# Altium PCB WikiHub-Mini.PcbDoc
Units mil, origin at the board's own origin, x right, y up, seen from the top; angles counter-clockwise.
Board outline 1973.26 x 1977.05 mil, 2 copper layers (Top Layer, Bottom Layer); 66 components, 44 nets, 224 pads, 187 vias.
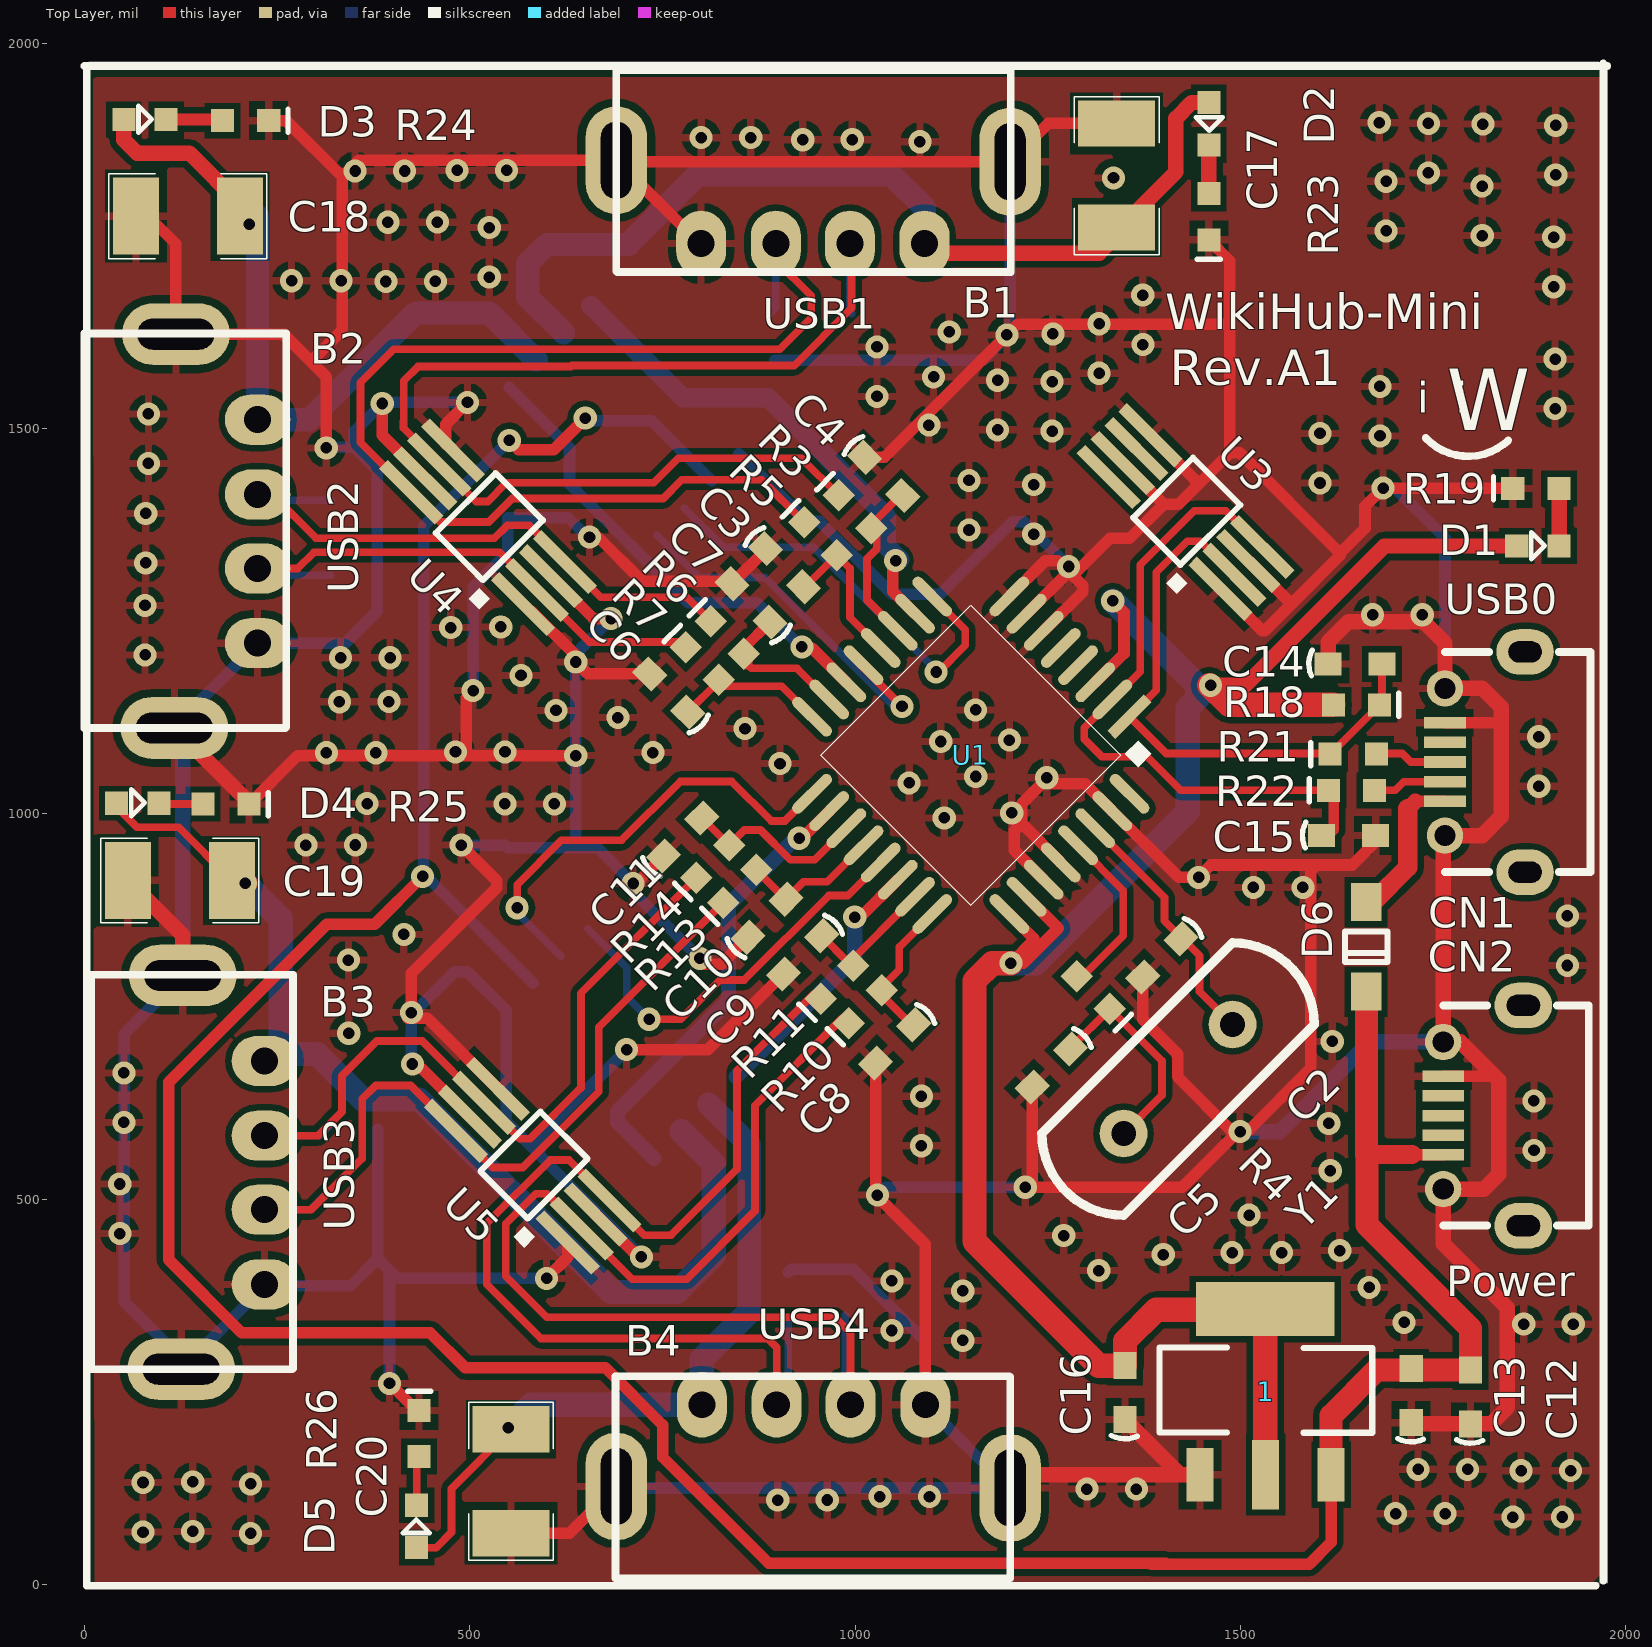
[diagram p0: Top Layer view]
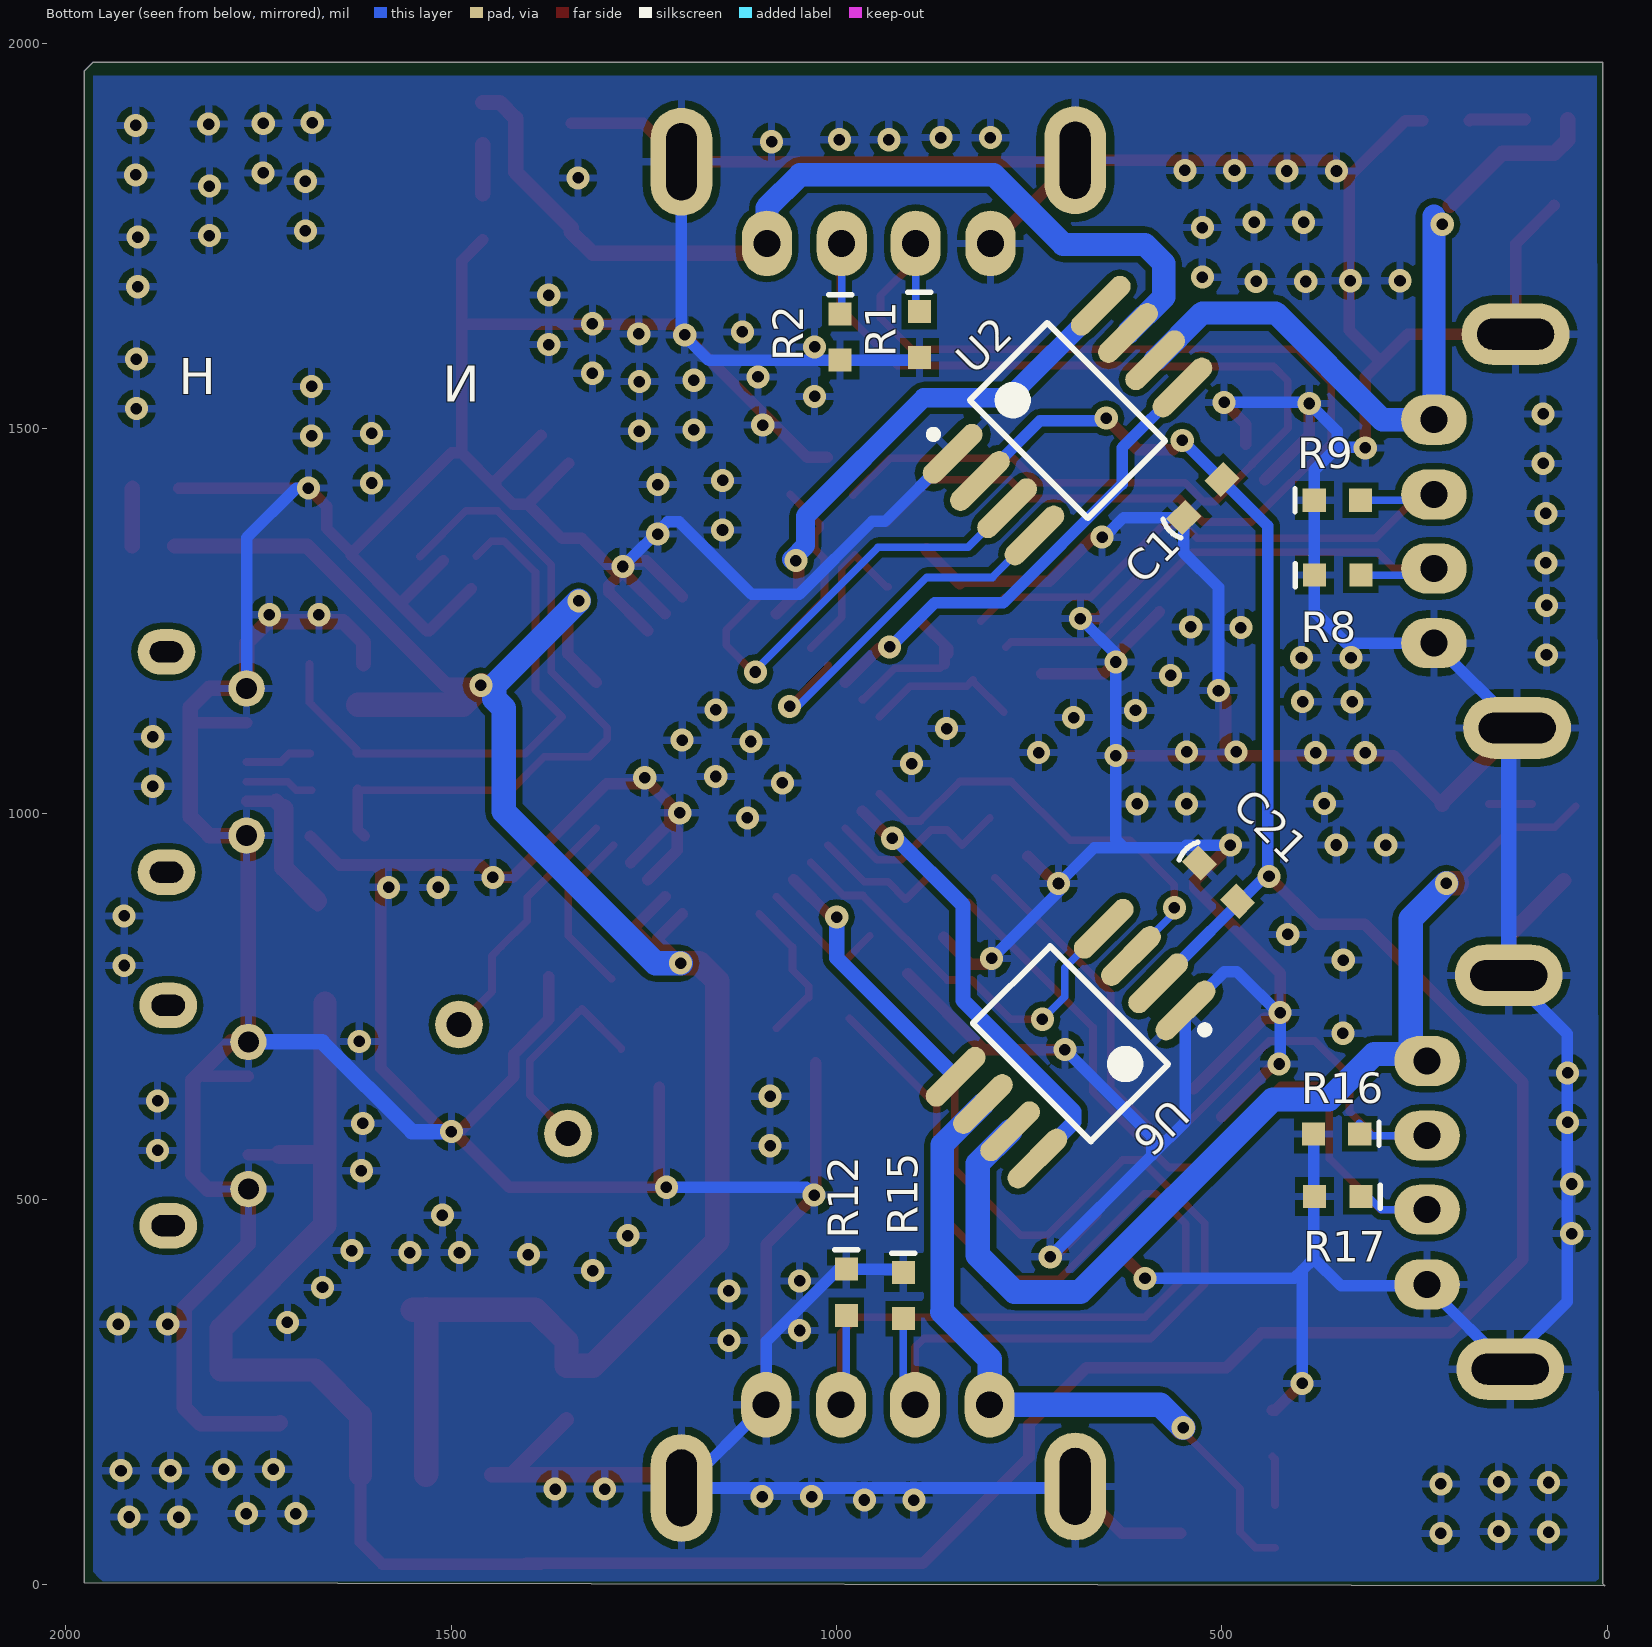
[diagram p1: Bottom Layer view, seen from below]
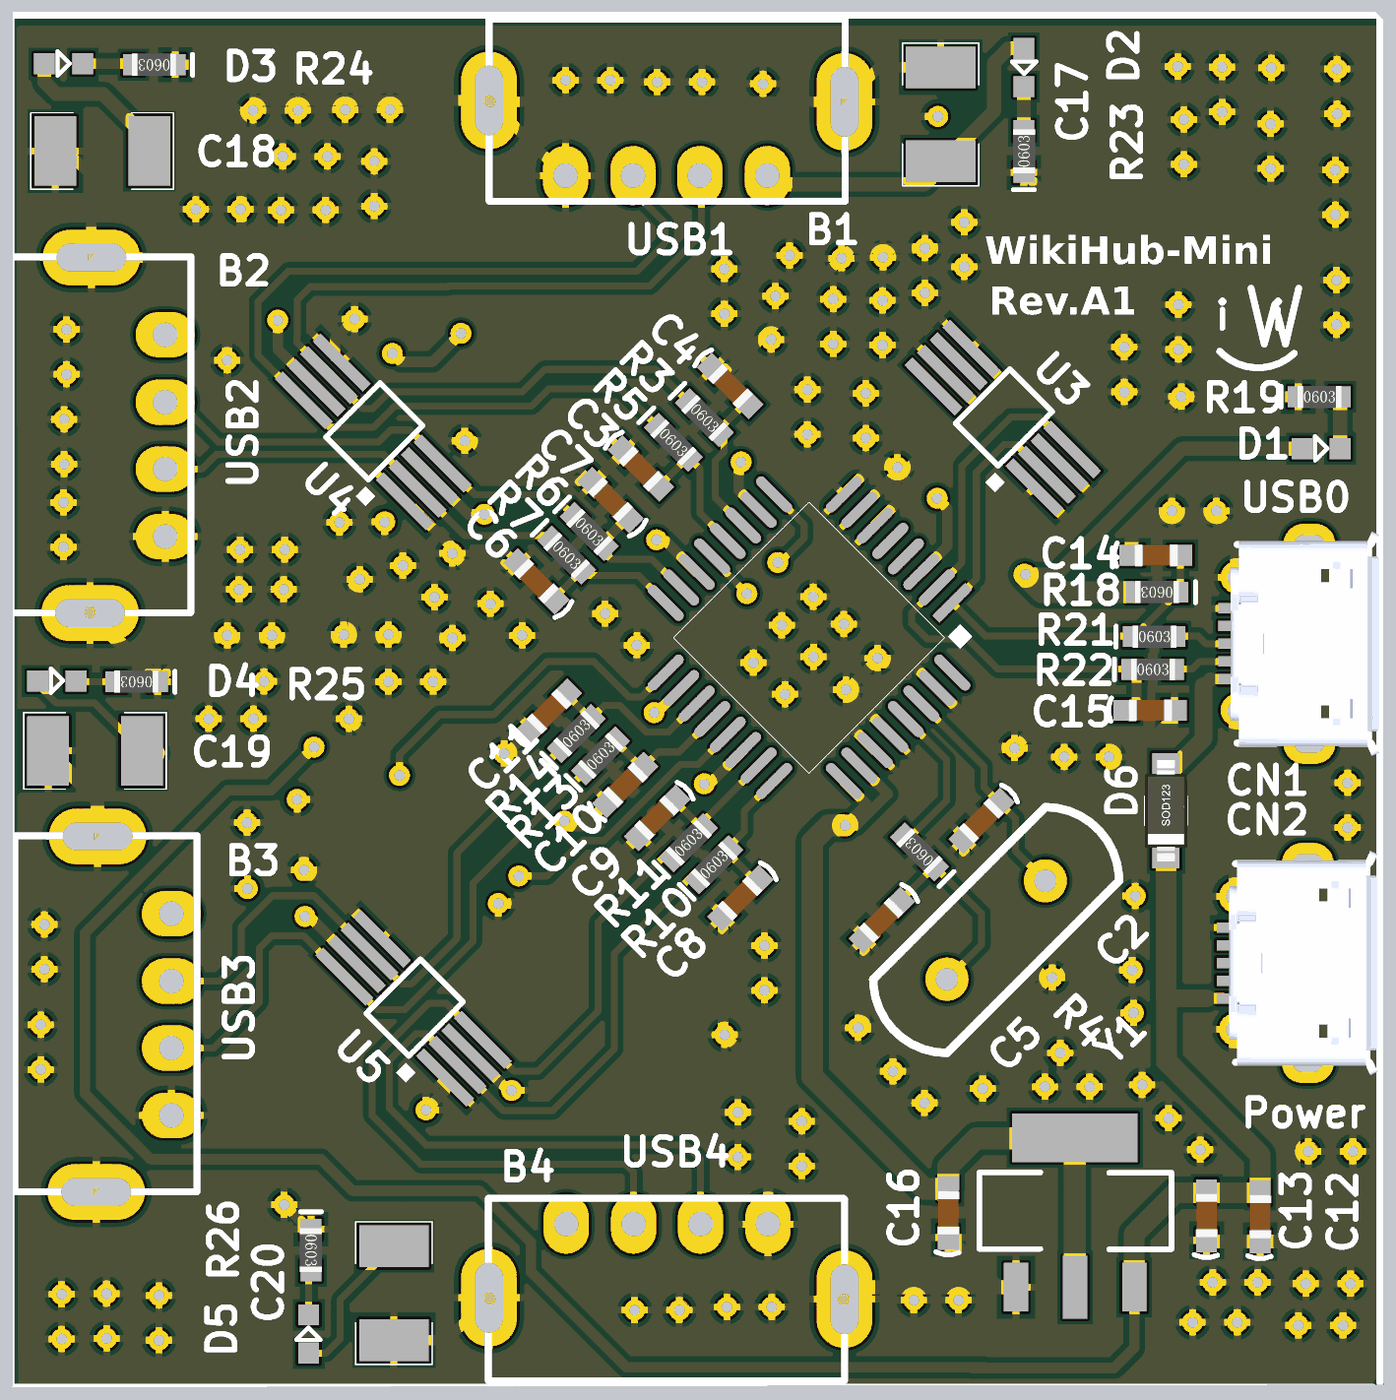
[diagram p2: 3D render of the assembled board from above, using the file's embedded part models]
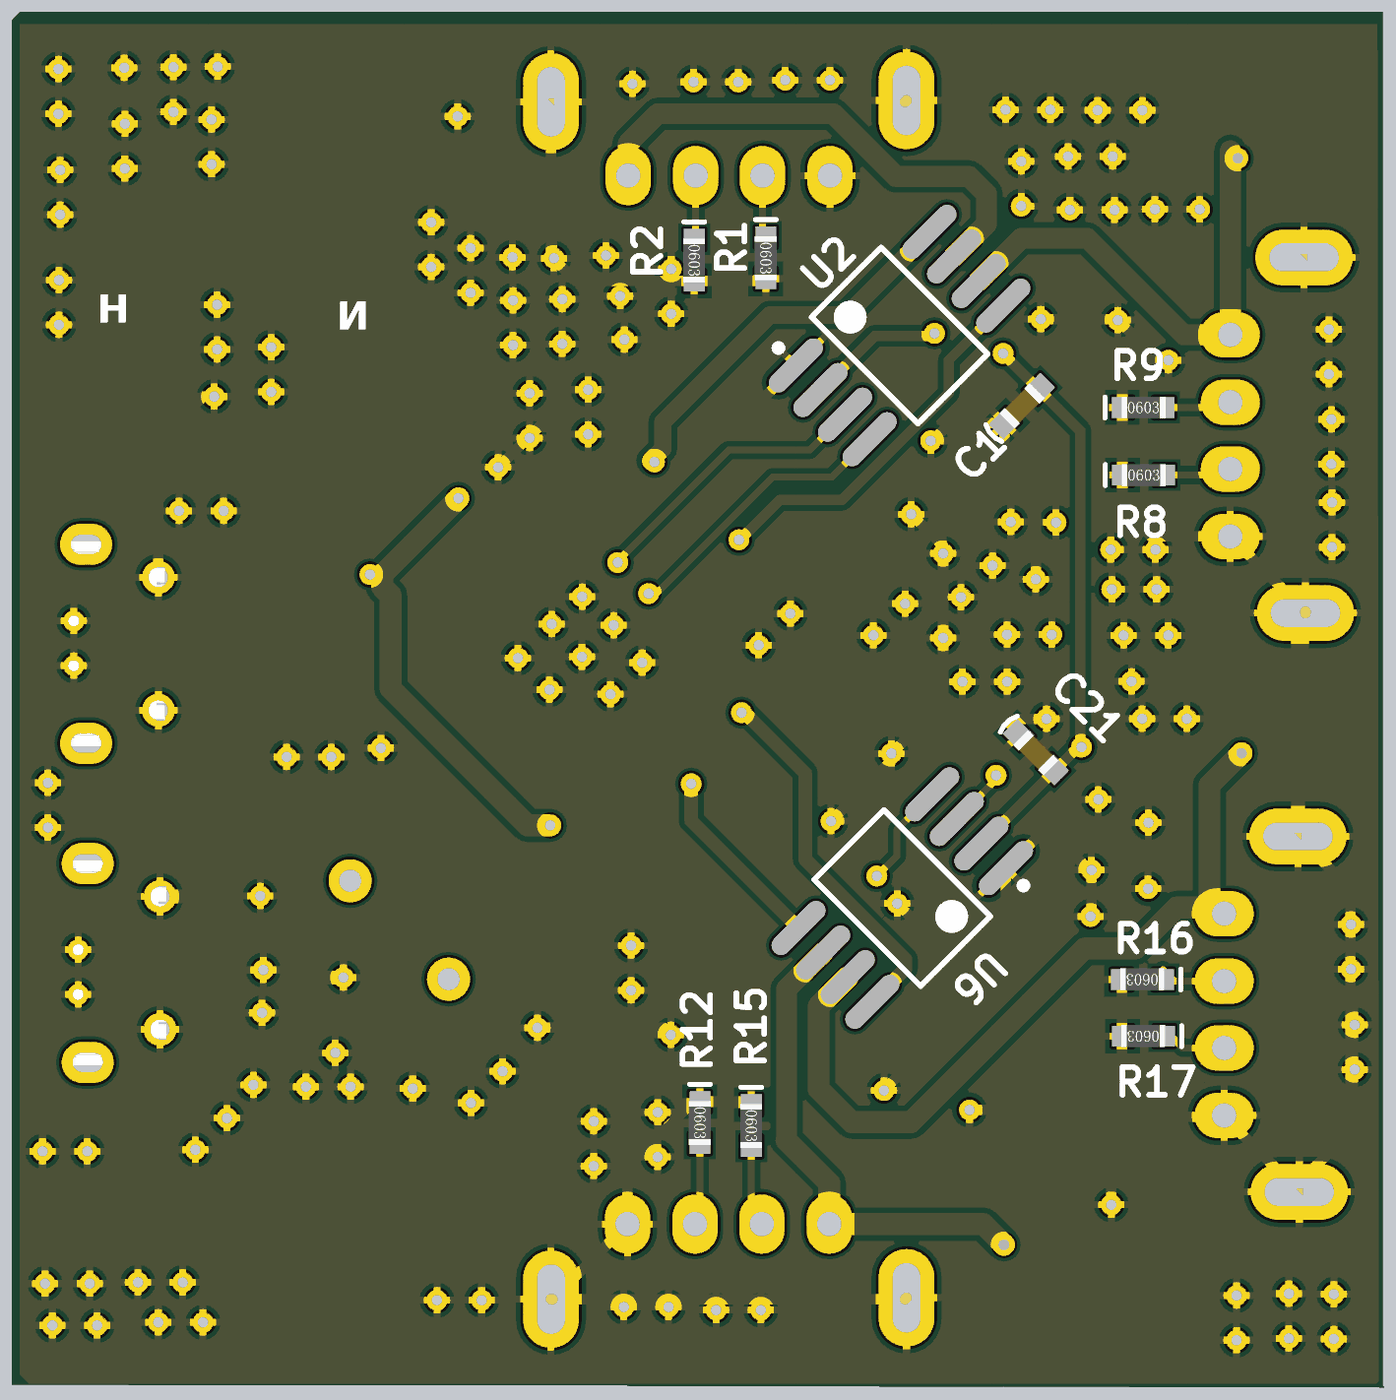
[diagram p3: 3D render of the assembled board from below, using the file's embedded part models]

## Layer stack, top to bottom
Top Solder: solder mask 0.4, Solder Resist, Dk 3.5
Top Layer: signal copper 1.4
Dielectric1: dielectric 12.6, FR-4, Dk 4.8
Bottom Layer: signal copper 1.4
Bottom Solder: solder mask 0.4, Solder Resist, Dk 3.5

## Board outline
2.87,-1.66 5.26,0.73 5.26,1975.39 1964.63,1975.39 1969.23,1970.79 1976.13,1963.89 1976.13,2.22

## Design rules (kind name [scope] priority, off if disabled: settings)
Clearance Clearance_1 [All] p1: gap=7.87
Clearance [All] p2 off: gap=0.01
PolygonConnect PolygonConnect_1 [All] p1: connectstyle=Relief reliefconductorwidth=10 reliefentries=4 polygonreliefangle="90 Angle" airgapwidth=10
RoomDefinition WikiHub-Mini [InComponentClass('WikiHub-Mini')] p1: confinementstyle=ConfineIn formatcopy=TRUE lockcomponents=FALSE outline -11.91,-15.15 1970.62,-15.15 1970.62,1984.6 -11.91,1984.6
RoutingVias [All] p1: holewidth=28 width=50 viastyle="Through Hole" minholewidth=10 minwidth=30 maxholewidth=28 maxwidth=50
SilkToSolderMaskClearance SilkscreenOverComponentPads [IsPad] p1: minsilkscreentomaskgap=10 clearancetoexposedcopper=TRUE
SolderMaskExpansion [All] p1: expansion=4
Width [All] p1: maxlimit=393.7 minlimit=10 preferedwidth=10 minimp=50.000000 maximp=50.000000 favimp=50.000000
28 further rules are at their usual default settings.

## Components (designator, comment, footprint, x,y, rotation, side; value= is the part's Value field where it differs from the comment)
1 "1117" 1117 1537.68,260.91 r0 top
B1 "USB" USB-A-Female-T2-Lite 1090.15,1740.33 r90 top
B2 "USB" USB-A-Female-T2-Lite 224.65,1511.52 r180 top
B3 "USB" USB-A-Female-T2-Lite 233.53,679.37 r180 top
B4 "USB" USB-A-Female-T2-Lite 801.15,233.21 r270 top
C1 "Cap" C0603L 524.43,1409.26 r135 bottom
C2 "27pF" C0603L 1398.14,813.13 r225 top
C3 "22pF" C0603L 908.38,1319.58 r315 top
C4 "22pF" C0603L 1037,1437.99 r315 top
C5 "27pF" C0603L 1254.64,670.17 r225 top
C6 "22pF" C0603L 758.16,1156.96 r135 top
C7 "22pF" C0603L 864.87,1273.9 r135 top
C8 "22pF" C0603L 1051.37,701.49 r225 top
C9 "22pF" C0603L 931.89,817.1 r225 top
C10 "22pF" C0603L 885.73,864.54 r45 top
C11 "22pF" C0603L 776.13,970.03 r45 top
C12 "Cap" C0603L 1798.62,243.34 r90 top
C13 "Cap" C0603L 1721.7,244.96 r90 top
C14 "22pF" C0603L 1648.81,1194.62 r0 top
C15 "22pF" C0603L 1640.52,971.79 r0 top
C16 "Cap" C0603L 1350.29,248.89 r90 top
C17 "100UF" 1210 1339.42,1760.81 r90 top
C18 "100UF" 1210 201.68,1775.67 r180 top
C19 "100UF" 1210 191.26,913.5 r180 top
C20 "100UF" 1210 553.49,201.46 r270 top
C21 "Cap" C0603L 504.1,911.47 r225 bottom
CN1 "USB-5P-2H" USB-B-MICRO-Female-T3 1765.49,1067.31 r270 top
CN2 "USB-5P-2H" USB-B-MICRO-Female-T3 1763.16,608.52 r270 top
D1 "LED" 0603pn 1858.67,1347.68 r0 top
D2 "LED" 0603pn 1459.03,1923.12 r270 top
D3 "LED" 0603pn 50.97,1901.1 r0 top
D4 "LED" 0603pn 41.4,1013.78 r0 top
D5 "LED" 0603pn 430.99,47.81 r90 top
D6 "B5817" SOD-123 1663.24,827.43 r90 top
R1 "15K" R0603 892.4,1622.04 r270 bottom
R2 "15K" R0603 995.23,1618.89 r270 bottom
R3 "27" R0603 999.82,1392.18 r315 top
R4 "1.5K" R0603 1309,768.01 r135 top
R5 "27" R0603 954.98,1357.04 r315 top
R6 "27" R0603 834.13,1228.73 r315 top
R7 "27" R0603 801.68,1195.16 r315 top
R8 "15K" R0603 349.45,1309.87 r180 bottom
R9 "15K" R0603 349.9,1406.95 r180 bottom
R10 "27" R0603 1013.19,749.65 r45 top
R11 "27" R0603 976.57,781.42 r45 top
R12 "15K" R0603 987.15,379.13 r270 bottom
R13 "27" R0603 850.23,906.16 r45 top
R14 "27" R0603 815.35,938.17 r45 top
R15 "15K" R0603 913.18,374.93 r270 bottom
R16 "15K" R0603 350.9,584.74 r0 bottom
R17 "15K" R0603 349.49,503.3 r0 bottom
R18 "1K5" R0603 1650.67,1141.52 r180 top
R19 "1K" R0603 1883.49,1422.4 r0 top
R21 "0" R0603 1646.41,1077.67 r0 top
R22 "0" R0603 1644.17,1030.49 r0 top
R23 "1K" R0603 1459.04,1774.94 r90 top
R24 "1K" R0603 209.02,1899.59 r180 top
R25 "1K" R0603 183.62,1012.69 r180 top
R26 "1K" R0603 434.21,195.93 r270 top
U1 "TUSB 32" TQFP32 1183.46,1088.32 r225 top
U2 "TPS2042" SO8W_M 700.11,1510.41 r135 bottom
U3 "SN75240" "SOP8 - 0.65" 1474.09,1292.2 r135 top
U4 "SN75240" "SOP8 - 0.65" 569.03,1272.36 r135 top
U5 "SN75240" "SOP8 - 0.65" 627.1,443.88 r135 top
U6 "TPS2042" SO8W_M 696.21,701.81 r315 bottom
Y1 "6M" XTAL 1344.89,581.65 r45 top

## Footprints (in the part's own frame and the unit in brackets; to place one, negate y for a bottom-side part, rotate by r counter-clockwise, add the part's x,y. Pads: shape width x height; smd on the part's side, far side on the other; paste and mask are expansions set on the pad)
0603pn [mil]
  rect 30x30 smd: 1(0,0) 2(55,0)
  silkscreen extent 19,-17 36,18
1117 [mil]
  rect 35x70 smd: 1(-90,-118.5) 3(80,-118.5)
  rect 180x70 smd: 2(-5.5,96.5)
  rect 35x90 smd: 2(-5,-118.5)
  silkscreen extent -142,-64 134,46
1210 [mil]
  rect 60x100 smd: 1(0,0) 2(135,0)
  silkscreen extent -35,-55 170,55
C0603L [mil]
  rect 35x30 smd: 1(-35,0) 2(35,0)
  silkscreen extent -60,-16 -56,18, body extent -31,-16 32,15, height 24
R0603 [mil]
  rect 30x30 smd: 1(-30,0) 2(30,0)
  silkscreen extent -55,-15 -55,15, body extent -31,-16 32,15, height 18
SO8W_M [mm] "8-Pin Small Outline Package 1.27 mm Pitch, IPC Low Density"
  oval 2.5x0.7 smd: 1(-3.45,1.905) 2(-3.45,0.635) 3(-3.45,-0.635) 4(-3.45,-1.905) 5(3.45,-1.905) 6(3.45,-0.635) 7(3.45,0.635) 8(3.45,1.905)
  silkscreen extent -3.57,-2.75 1.8,2.93, body extent -2.73,-2.75 2.73,2.75, height 2.13
SOD-123 [mm]
  rect 1.25x1 smd: 1(1.475,0) 2(-1.475,0)
  silkscreen extent -0.5,-0.7 0.5,0.7, body extent -1.85,-0.77 1.85,0.78, height 1.35
"SOP8 - 0.65" [mm] "Small Outline; 8 Leads; Body Width 4.3 mm; Pitch 1.27 mm"
  rect 2.6x0.4 smd: 1(0,0) 2(0,-0.65) 3(0,-1.3) 4(0,-1.95) 5(5.207,-1.95) 6(5.207,-1.3) 7(5.207,-0.65) 8(5.207,0)
  silkscreen extent 0.89,-2.41 3.69,1.14
TQFP32 [mm]
  rect 1.7x0.37 smd: 1(-3.781,2.422)
  oval 1.7x0.37 smd: 2(-3.781,1.622) 3(-3.781,0.822) 4(-3.781,0.022) 5(-3.781,-0.778) 6(-3.781,-1.578) 7(-3.781,-2.378) 8(-3.781,-3.178) 17(5.419,-3.178) 18(5.419,-2.378) 19(5.419,-1.578) 20(5.419,-0.778) 21(5.419,0.022) 22(5.419,0.822) 23(5.419,1.622) 24(5.419,2.422)
  oval 0.37x1.7 smd: 9(-1.981,-4.978) 10(-1.181,-4.978) 11(-0.381,-4.978) 12(0.419,-4.978) 13(1.219,-4.978) 14(2.019,-4.978) 15(2.819,-4.978) 16(3.619,-4.978) 25(3.619,4.222) 26(2.819,4.222) 27(2.019,4.222) 28(1.219,4.222) 29(0.419,4.222) 30(-0.381,4.222) 31(-1.181,4.222) 32(-1.981,4.222)
  silkscreen extent -3.43,-3.88 4.32,3.81
USB-A-Female-T2-Lite [mil]
  oval 85x65 hole 35: 1(0,0) 2(0,97) 3(0,193) 4(0,290)
  oval 140x80 hole 40 slot 100 at 0 deg: 5(108,400) 6(106,-111)
  silkscreen extent -37,-112 225,400
USB-B-MICRO-Female-T3 [mil] "USB Micro SMT 5S B"
  rect 15x54 smd: 1(51,0) 2(25.5,0) 3(0,0) 4(-25.5,0) 5(-51,0)
  round 47.24 hole 27.5: 6(-95.5,0) 7(95.5,0)
  oval 59.06x74.8 hole 27.56 slot 43.31 at 90 deg: 8(143,104) 9(-143,104)
  silkscreen extent -143,0 143,189, body extent -161,-9 161,204, height 105
XTAL [mil]
  round 62 hole 32: 1(5,0) 2(205,0)
  silkscreen extent -101,-75 311,75

## Part data
1: library part 117
C1 C12 C13 C16 C21: "Capacitor"
C2 C3 C4 C5 C6 C7 C8 C9 C10 C11 C14 C15: library part Cap, "Capacitor"
C17 C18 C19 C20: library part CAP, "Capacitor"
CN1 CN2: "USB-M5P-2H"
D1 D2 D3 D4 D5: library part LED0, "Typical INFRARED GaAs LED"
D6: library part "D Schottky", "Schottky Diode"
R1 R2 R3 R4 R5 R6 R7 R8 R9 R10 R11 R12 R13 R14 R15 R16 R17 R18 R19 R21 R22 R23 R24 R25 R26: library part RES
Y1: library part XTAL, "Crystal Oscillator"

## Via types
v1: diameter 30, hole 15, Top Layer to Bottom Layer, 187 vias

## Nets (pads, with @x,y where several pads share a name; then routed paths per layer and width w, separated by ;. In a path a pad name is that pad's centre, name@x,y a point inside that pad or via, vN(x,y) a via of type N, cw(c..) or ccw(c..) an arc to the next point about the centre after c; other vN are vias at no path point)
D3V3: 1.2 C16.2 D1.1 R18.2 U1.3 U1.25 U1.26 | length 2755.2
  Top Layer w15: U1.25 1231.95,838.33 1231.95,836.02 v1(1202.21,806.28) 1218.34,806.28 1263.44,851.38 U1.26 ; U1.3 1348.92,1208.01 1348.92,1261.83 v1(1334.28,1276.47)
  Top Layer w20: v1@1459.74,1166.87 1505.99,1166.87 1686.8,1347.68 D1.1
  Top Layer w31.5: v1(1202.21,806.28) 1177.92,806.28 1154.79,783.15 1154.79,445.32 1316.23,283.89 C16.2 1350.29,315.86 1390.86,356.42 1.2@1549.92,356.42 ; v1@1459.74,1166.87 1485.1,1141.52 R18.2 ; 1.2@1532.18,357.41 1532.18,142.91 1.2@1532.68,142.41
  Bottom Layer w31.5: v1(1202.21,806.28) 1234.83,806.28 1431.69,1003.14 1431.69,1137.15 1443.92,1149.38 1443.92,1166.82 v1(1334.28,1276.47)
  other v1: 1461.42,1166.87
D5V: 1.3 C1.2 C12.2 C13.2 C21.2 CN2.1 D6.2 U2.2 U6.2 | length 4525.6
  Top Layer w15: v1(438.65,918.8) 376.67,856.82 314.47,856.82 109.19,651.54 109.19,421.41 204.22,326.37 448.79,326.37 494.09,281.08 676.01,281.08 750.13,206.96 750.13,165.32 888.18,27.27 1402.85,27.27 ; v1(551.2,1484.65) 563.18,1472.68 608.98,1472.68 v1(649.85,1513.54) ; 1384.39,26.3 1589.17,26.3 1617.68,54.81 1.3 ; 1722.3,557.82 CN2.1
  Top Layer w25: 1663.58,557.52 1664.11,557.52 1722.3,557.82
  Top Layer w30: 1.3 1617.68,219.04 1676.98,278.34 C12.2 1798.62,332.04 1664.11,466.55 1664.11,557.52 ; 1663.58,557.52 D6.2@1663.58,754.49
  Bottom Layer w15: v1(438.65,918.8) 443.86,918.8 U6.2 ; v1@440.23,922.43 440.23,1373.68 v1(551.2,1484.65) ; v1(649.85,1513.54) 653.37,1510.02 735.85,1510.02 U2.2
DM0: C15.1 R22.1 U1.2 U3.4 | length 894.4
  Top Layer w10: U3.4@1540.31,1334.02 1481.07,1393.27 1439.93,1393.27 1370,1323.34 1370,1184.56 U1.2 1297.37,1111.92 1297.37,1097.21 1320.45,1074.13 1379.09,1074.13 1422.38,1030.84 R22.1@1621.12,1030.84
  Top Layer w14: C15.1@1612.58,971.22 1621.12,979.75 R22.1@1621.12,1030.84
DM1: B1.2 R2.1 R3.1 U4.6 | length 1506.4
  Top Layer w10: U4.6 508.46,1405.31 523.11,1405.31 547.49,1429.68 738.66,1429.68 770.61,1461.63 930.37,1461.63 R3.1 ; U4.6@460.72,1453.97 414.03,1500.66 414.03,1509.53 414.28,1509.79 414.28,1562.05 432.82,1580.58 631.37,1580.58 632.55,1581.76 920.83,1581.76 995.23,1656.16 995.23,1738.25 B1.2
  Bottom Layer w10: B1.2 993.15,1650.97 R2.1
DM2: B2.2 R6.1 R9.2 U4.4 | length 769
  Top Layer w10: B2.2 243.46,1414.52 300.45,1357.52 531.83,1357.52 548.91,1374.61 576.79,1374.61 670.08,1281.32 781.54,1281.32 R6.1
  Bottom Layer w10: B2.2 232.22,1406.95 R9.2
DM3: B3.2 R14.1 R16.1 U5.6 | length 998
  Top Layer w10: B3.2 302.89,582.37 334.08,613.55 334.08,660.09 379.19,705.2 438.16,705.2 U5.6 565.06,578.3 578.11,578.3 644.19,644.38 644.19,767.01 R14.1
  Bottom Layer w10: B3.2 305.16,582.37 R16.1@321.39,598.6
DM4: B4.2 R11.1 R15.2 U5.4 | length 1384.8
  Top Layer w10: B4.2 898.15,307.54 886.62,319.07 592.45,319.07 522.1,389.42 522.1,468.64 604.2,550.74 628.82,550.74 U5.4 726.5,453.06 761.01,453.06 846.65,538.7 846.65,666.47 R11.1@946.38,766.19
  Bottom Layer w10: B4.2 913.18,248.23 R15.2
DP0: C14.2 R18.1 R21.1 U1.1 U3.2 | length 731.3
  Top Layer w10: U3.2@1467.4,1334.47 1447.95,1353.92 1430.91,1353.92 1390.67,1313.68 1390.67,1160.68 U1.1 1403.94,1078.36 1622.86,1078.36 1622.86,1083.71 R18.1 1683.81,1144.65 C14.2
DP1: B1.3 R1.1 R5.1 U4.8 | length 1586.8
  Top Layer w10: B1.3@904.62,1732.86 B1.3 897.15,1717.89 942.91,1672.13 942.91,1643.58 902.28,1602.95 401.51,1602.95 358.04,1559.48 358.04,1482.36 461.61,1378.79 524.43,1378.79 554.89,1409.25 751.02,1409.25 775.25,1433.47 878.54,1433.47 R5.1
  Top Layer w14: B1.3@904.62,1732.86 B1.3@911.17,1726.32
  Bottom Layer w10: R1.1 897.15,1656.79 B1.3
DP2: B2.3 R7.1 R8.2 U4.2 | length 714
  Top Layer w10: B2.3 276.76,1318.52 297.89,1339.65 538.7,1339.65 655.38,1222.97 773.87,1222.97 R7.1
  Bottom Layer w10: B2.3 233.31,1309.87 R8.2
DP3: B3.3 R13.1 R17.1 U5.8 | length 1039
  Top Layer w10: B3.3 293.85,486.37 360.36,552.87 360.36,630.16 377.77,647.57 423.41,647.57 U5.8 529.84,541.14 568.69,541.14 667.19,639.64 667.19,723.12 R13.1
  Bottom Layer w10: B3.3 292.77,486.37 R17.1@318.79,512.39
DP4: B4.3 R10.1 R12.2 U5.2 | length 1476.4
  Top Layer w10: R10.1@983,734.42 870,621.41 870,484.64 781.63,396.27 710.91,396.27 U5.2 600.18,506.99 585.74,506.99 546.64,467.9 546.64,399.87 599.64,346.87 973.32,346.87 994.15,326.05 B4.3
  Bottom Layer w10: R12.2 987.15,240.21 B4.3
EN1: U1.9 U2.3 | length 549.5
  Top Layer w10: U1.9 1143.04,1239.04 1143.04,1218.8 1108.36,1184.11 v1(1105.19,1184.11)
  Bottom Layer w10: U2.3 829.3,1345.86 945.98,1345.86 1105.19,1186.65 v1(1105.19,1184.11)
EN2: U1.13 U2.4 | length 483.8
  Top Layer w10: U1.13 1010.94,1189.38 v1(1060.85,1139.47)
  Bottom Layer w10: U2.4 797.61,1306.84 882.81,1306.84 1050.17,1139.47 v1(1060.85,1139.47)
EN3: U1.17 U6.3 | length 590.7
  Top Layer w10: v1(561.44,878.19) 561.44,908.2 618.83,965.6 696.76,965.6 773.11,1041.94 839.98,1041.94 891.05,990.87 909.06,990.87 U1.17
  Bottom Layer w10: v1(561.44,878.19) 560.39,877.14 560.39,872.98 U6.3
EN4: U1.21 U6.4 | length 535
  Top Layer w10: v1(732.77,733.53) 773.77,733.53 824.77,784.53 856.19,784.53 965.62,893.96 990.33,893.96 U1.21
  Bottom Layer w10: U6.4 703.74,800.34 703.74,762.56 v1(732.77,733.53)
GND: 1.1 B1.4 B1.5 B1.6 B2.4 B2.5 B2.6 B3.4 B3.5 B3.6 B4.4 B4.5 B4.6 C1.1 C2.2 C3.1 C4.1 C5.2 C6.2 C7.2 C8.2 C9.2 C10.1 C11.1 C12.1 C13.1 C14.1 C15.2 C16.1 C17.2 C18.2 C19.2 C20.2 C21.1 CN1.5 CN1.6 CN1.7 CN2.5 CN2.6 CN2.7 R1.2 R2.2 R8.1 R9.1 R12.1 R15.1 R16.2 R17.2 R19.1 R23.1 R24.1 R25.1 R26.1 U1.6 U1.7 U1.8 U1.27 U1.28 U1.31 U2.1 U3.1 U3.3 U3.5 U3.7 U4.1 U4.3 U4.5 U4.7 U5.1 U5.3 U5.5 U5.7 U6.1 | length 18922.4
  Top Layer w15: C18.2@68.8,1789.48 118.65,1739.63 B2.6 258.56,1622.52 313.7,1567.38 v1(313.7,1474.91) ; R25.1 276.64,1075.72 v1@495.11,1075.72 ; R24.1 261.81,1899.59 334.36,1827.04 ; 294.2,1587.38 334.36,1627.53 334.36,1827.04 ; v1(386.41,1532.54) 386.41,1491.19 U4.7@444.04,1433.56 ; v1(395.76,260.96) 430.78,225.93 R26.1 ; v1(425.55,675.44) 430.83,670.17 437,670.17 U5.7 ; U4.5@468.79,1479.65 468.79,1505.74 v1(497.02,1533.98) ; v1(488.86,959.48) 535.04,913.3 535.04,904.04 424.2,793.2 v1(424.2,742.12) 424.2,739.18 419.61,734.59 444.97,734.59 U5.5 ; v1(504.23,1159.99) 495.11,1150.88 v1@495.11,1075.72 ; C20.2 629.4,66.46 B4.6 ; U4.1@580.81,1262.32 637.44,1205.69 v1(637.44,1197.12) 652.85,1181.71 C6.2 ; v1(599.59,397.21) 627.1,424.72 U5.1 ; U4.3@607.17,1306.77 660.5,1253.44 v1(683.39,1253.44) ; v1(637.44,1075.72) v1@495.11,1075.72 ; v1(655.29,1359.09) 655.42,1359.22 666.28,1359.22 723.82,1301.69 837.07,1301.69 C7.2 883.63,1342.15 C3.1 ; U5.3 711.69,431.68 721.96,431.68 722.6,431.04 v1(722.6,425.18) ; v1(703.5,694.03) 808.81,694.03 C9.2 ; v1(711.86,909.64) 715.74,909.64 C11.1 ; v1(798.58,812.4) 806.08,804.9 826.09,804.9 C10.1 ; B1.4 798.15,1740.33 B1.5@692.15,1846.33 ; C4.1 1038.14,1462.74 v1(1196.93,1621.53) 1211.04,1635.64 1486.43,1635.64 ; v1@1026.62,506.21 C8.2 ; v1@1028.24,504.59 1091.15,441.68 B4.4 ; U1.8 1246.62,1328.43 1263.15,1328.43 ; U1.7 v1@1277.16,1314.42 ; C5.2 1229.89,524.57 v1(1220.73,515.4) 1424.42,515.4 v1@1488.17,579.15 ; U1.27 1206.49,952.88 1206.49,977.98 1216.21,987.7 ; U1.6 1295.21,1287.94 1295.21,1296.37 v1@1277.16,1314.42 ; U1.28 1216.21,987.7 ; v1(1277.16,1321.03) v1@1277.16,1314.42 ; C17.2@1344.22,1895.98 1250.8,1895.98 B1.6 B1.5@692.15,1846.33 ; U3.7 1400.59,1401.9 ; C2.2 1373.39,733.37 1418.51,688.24 1418.51,658.64 1489.54,587.61 v1(1499.66,587.61) ; U3.5 1442.4,1432.47 1442.4,1424.55 ; R23.1 1486.43,1717.54 1486.43,1635.64 ; U3.1 1528.5,1237.8 1531.72,1237.8 1565.89,1271.98 ; v1@1497.32,589.13 1510.53,589.13 1591.11,669.71 1591.11,925.85 1597.7,932.44 1597.7,933.69 ; U3.3 1565.89,1272.79 1565.89,1271.98 ; C15.2@1682.58,971.22 1645.06,933.69 1597.7,933.69 ; v1@1685.24,1422.4 R19.1 ; v1(1685.24,1422.72) 1661.68,1399.16 1661.68,1370.68 1629.37,1338.37 ; CN2.5 1820.23,659.52 1825.18,664.47 ; CN1.5 1834.93,1118.31 1838.42,1121.8 ; 334.36,1827.04 355.65,1848.33 B1.5 B1.5@692.15,1846.33 ; 1216.21,987.7 1216.21,1013.16 1242.28,1039.22 1298.32,1039.22 U1.31 1419.97,917.57 v1(1445.78,917.57) 1445.78,917.96 1461.51,933.69 1597.7,933.69 ; v1@1277.16,1314.42 1287.4,1314.42 1330.4,1357.43 1356.11,1357.43 1400.59,1401.9 ; 1400.59,1401.9 1419.75,1401.9 1442.4,1424.55 ; 1442.4,1424.55 1486.43,1468.58 ; 1486.43,1468.58 1486.43,1635.64 ; 1486.43,1468.58 1499.16,1468.58 1629.37,1338.37 ; 1565.89,1271.98 1629.37,1335.46 1629.37,1338.37
  Top Layer w20: C19.2 127.53,842.23 B3.6 ; B2.5 213.62,1014.55 R25.1 ; B4.5 1218.35,142.41 1421.77,142.41 ; C16.1 1421.77,142.41 ; 1.1 1421.77,142.41 ; C14.1 1613.81,1222.79 1640.39,1249.38 1737.7,1249.38 1765.49,1221.59 CN1.6 1814.05,1162.81 1838.42,1138.45 1838.42,1121.8 1838.42,996.38 1813.85,971.81 CN1.7 1763.16,969.49 CN2.6 1785.63,704.02 1825.18,664.47 1835.22,654.43 1835.22,532.06 1816.18,513.02 CN2.7 1763.16,442.2 1846.36,359.01 1846.36,229.61 1825.09,208.34 C12.1 1723.32,208.34 C13.1
  Bottom Layer w15: B2.5 116.65,1113.52 B2.4 338.42,1221.52 379.9,1263.01 R9.1 379.9,1446.03 350.14,1475.8 ; B3.6 51.74,714.58 51.74,367.01 125.53,293.22 B3.5 233.53,387.37 345.09,387.37 380.49,422.77 ; v1(313.7,1474.91) 312.81,1475.8 350.14,1475.8 ; R16.2@380.49,590.76 380.49,422.77 ; v1(395.76,260.96) 395.76,407.51 ; v1(424.2,742.12) v1@424.2,739.18 ; v1(425.55,675.44) 425.39,675.29 424.2,676.48 v1@424.2,739.18 ; v1(488.86,959.48) 545.81,959.48 548.96,956.32 627.15,956.32 ; v1@497.38,1533.98 v1(497.02,1533.98) 387.85,1533.98 v1(386.41,1532.54) 350.14,1496.27 350.14,1475.8 ; v1(504.23,1159.99) 504.23,1293.9 549.18,1338.85 C1.1 627.37,1384.51 652.8,1359.09 v1(655.29,1359.09) v1@659.21,1363 ; v1(599.59,397.21) 406.06,397.21 395.76,407.51 ; v1(683.39,1253.44) 683.33,1253.5 637.44,1207.61 v1(637.44,1197.12) v1(637.44,1075.72) 637.44,966.62 627.15,956.32 ; B4.6 692.15,125.21 B4.5@1199.15,125.21 ; v1(703.5,694.03) 590.47,580.99 590.47,557.32 ; v1@724.96,427.54 v1(722.6,425.18) 590.47,557.32 ; v1@792.48,811 797.18,811 v1(798.58,812.4) 711.86,899.13 v1(711.86,909.64) 665.17,956.32 627.15,956.32 ; U2.1 937.05,1379.53 953.77,1379.53 1048.17,1285.13 1110.17,1285.13 1203.86,1378.83 1219.36,1378.83 v1(1277.16,1321.03) ; R1.2@895.55,1588.89 R2.2 1164.28,1588.89 ; R15.1 917.38,409.13 R12.1 997.37,409.13 1091.15,315.35 B4.4 B4.5@1199.15,125.21 ; v1(1028.89,505.23) 1039.05,515.4 v1(1220.73,515.4) ; 1166.67,1589.36 v1@1199.31,1622.01 ; v1(1196.93,1621.53) 1201.15,1625.75 B1.6 ; B4.5 B4.5@1199.15,125.21 ; v1(1685.24,1422.72) 1701.08,1422.72 1765.49,1358.32 CN1.6 ; 380.49,422.77 395.76,407.51 ; v1@424.2,739.18 480.24,795.21 496.74,795.21 U6.1 547.13,600.65 590.47,557.32
  Bottom Layer w20: B2.5 127.53,1100.64 B3.6 ; v1(1499.66,587.61) 1551.1,587.61 1667.51,704.02 CN2.6
  other v1: 215.62,66.24 75.88,68.01 140.43,68.89 1853.57,87.47 1917.85,87.5 1701.45,91.89 1765.73,91.93 899.56,109.55 963.84,109.58 1032.22,113.97 1096.5,114 1300.81,123.73 1365.09,123.77 215.58,130.53 75.84,132.29 140.4,133.17 1864.18,147.61 1928.47,147.65 1730.64,149.38 1794.92,149.41 1139.67,316.68 1047.83,329.6 1867.72,337.76 1932,337.8 1712.43,340.08 1139.63,380.96 1666.95,385.51 1047.8,393.88 1316.21,407.31 1399.86,427.97 1489.19,430.63 1553.47,430.66 1628.92,433.27 1270.74,452.74 45.81,455.39 1511.29,479.26 45.77,519.67 1616.57,536.85 1880.99,563.29 1086.09,569.26 1614.69,598.44 51.11,599.55 1880.96,627.57 1086.06,633.54 51.08,663.83 1619.2,704.8 342.86,715.36 1924.36,803.25 342.38,810.19 414.35,843.56 1924.33,867.53 1516.88,904.64 1581.16,904.67 287.17,959.57 351.45,959.61 1115.62,994.78 1203.29,1001.33 366.69,1013.23 545.48,1012.92 609.76,1012.96 1887.21,1035.86 1070.14,1040.21 1248.72,1046.81 1156.6,1048.5 902.56,1065.3 313.79,1079.32 378.08,1079.36 737.68,1079.5 481.4,1080.48 545.68,1080.51 1111.12,1093.93 1200.23,1095.68 1887.18,1100.14 857.08,1110.73 692.2,1124.93 611.87,1134.29 1156.39,1134.91 330.72,1145.59 395,1145.62 566.4,1179.73 332.23,1202.65 396.51,1202.68 78.52,1206.26 475.21,1241.69 540.17,1242.56 1671.67,1258.39 1735.95,1258.42 78.49,1270.54 79.41,1325.66 1231.85,1363.09 1147.83,1368.4 79.37,1389.94 1231.82,1427.37 1603.31,1429.43 1147.8,1432.68 82.95,1454.79 1681.13,1490.44 1603.28,1493.71 1255.73,1496.64 1184.98,1498.41 1095.65,1504.6 82.92,1519.07 1908.44,1525.83 1028.43,1541.74 1681.1,1554.72 1255.7,1560.92 1184.95,1562.69 1101.81,1567.11 1316.75,1571.81 1908.41,1590.11 1028.39,1606.02 1373.36,1608.96 1256.58,1622.82 1122.15,1625.48 1316.72,1636.09 1373.33,1673.24 1906.67,1684.14 391.02,1690.9 455.3,1690.93 268.68,1691.82 332.96,1691.85 525.2,1696.52 1906.64,1748.42 1813.81,1750.47 1689.1,1756.66 525.17,1760.8 393.67,1767.84 457.95,1767.88 1813.77,1814.75 1689.07,1820.94 1335.3,1825.36 1909.31,1829.18 1743.94,1831.84 351.09,1834.25 415.37,1834.28 483.45,1835 547.73,1835.03 1084.12,1872.24 932,1874.89 996.28,1874.93 800.21,1877.54 864.49,1877.57 1909.28,1893.46 1814.66,1895.23 1743.9,1896.12 1680.23,1897
NetC2_1: C2.1 U1.30 Y1.2 | length 328.6
  Top Layer w10: U1.30 1401.4,891.6 1401.4,861.49 1434.23,828.67 1447.06,815.84 1447.06,769.4 Y1.2
NetC3_2: C3.2 R5.2 U1.12 | length 204.3
  Top Layer w10: C3.2 935.19,1294.83 R5.2 993.25,1318.77 993.25,1255.21 U1.12
NetC4_2: C4.2 R3.2 U1.11 | length 218
  Top Layer w10: U1.11 1015.49,1277.51 1015.49,1331.04 1028.15,1343.7 1028.15,1363.85 R3.2 1021.03,1375.42 C4.2@1060.12,1414.52
NetC5_1: C5.1 R4.1 Y1.1 | length 278.2
  Top Layer w10: C5.1 1279.39,695.98 R4.1 ; R4.1@1334.47,743.47 1398.14,679.8 1398.14,634.9 Y1.1
NetC6_1: C6.1 R7.2 U1.16 | length 199.3
  Top Layer w10: C6.1 822.9,1172.2 R7.2 831.11,1165.73 904.55,1165.73 U1.16
NetC7_1: C7.1 R6.2 U1.15 | length 202.3
  Top Layer w10: R6.2@859.82,1194.62 865.53,1188.91 924.48,1188.91 964.97,1148.43 U1.15
  Top Layer w14: R6.2 855.34,1214.88 C7.1 ; R6.2@859.82,1194.62 R6.2@859.82,1215.34
NetC8_1: C8.1 R10.2 U1.24 | length 194.1
  Top Layer w10: R10.2@1035.85,761.29 1035.85,776.31 1057.15,797.6 1057.15,827.16 U1.24 ; R10.2@1036.22,763.43 C8.1@1077.77,721.88
NetC9_1: C9.1 R11.2 U1.23 | length 177.1
  Top Layer w10: C9.1 R11.2@990.02,808.47 ; R11.2@985.91,800.47 U1.23
NetC10_2: C10.2 R13.2 U1.20 | length 182
  Top Layer w10: R13.2@873.08,925.9 909.68,889.29 C10.2 933.02,911.84 963.66,911.84 U1.20
NetC11_2: C11.2 R14.2 U1.19 | length 243.6
  Top Layer w10: C11.2 801.17,994.78 R14.2 856.21,979.03 877.24,979.03 915.89,940.38 947.66,940.38 U1.19
NetCN1_1: CN1.1 D6.1 | length 196.2
  Top Layer w15: D6.1@1673.36,880.86 D6.1@1673.36,886.84 ; 1726.98,1016.31 CN1.1
  Top Layer w20: 1717.18,1006.52 1726.98,1016.31
  Top Layer w25: D6.1@1673.36,886.84 1717.18,930.66 1717.18,1006.52
NetCN1_2: CN1.2 R22.2 | length 88.9
  Top Layer w10: R22.2@1681.12,1030.84 1701.13,1030.84 1712.11,1041.81 CN1.2
NetCN1_3: CN1.3 R21.2 | length 87.2
  Top Layer w10: R21.2@1682.86,1078.36 1710.1,1078.36 1721.14,1067.31 CN1.3
NetD1_2: D1.2 R19.2 | length 74.8
  Top Layer w20: R19.2 1913.67,1422.22 D1.2
NetD2_2: D2.2 R23.2 | length 63.2
  Top Layer w20: R23.2@1459.03,1804.94 D2.2
NetD3_2: D3.2 R24.2 | length 73.7
  Top Layer w15: D3.2 177.5,1901.1 R24.2
NetD4_2: D4.2 R25.2 | length 56.1
  Top Layer w10: D4.2@97.48,1012.69 R25.2
NetD5_2: D5.2 R26.2 | length 64.5
  Top Layer w10: D5.2 430.99,162.71 R26.2
NetR4_2: R4.2 U1.29 | length 220.8
  Top Layer w10: U1.29 1348.14,900.32 1348.14,841.98 R4.2@1292.05,785.9
OC1: U1.10 U2.8 | length 653.6
  Top Layer w15: v1(1052.56,1328.7) 1056.35,1328.7 1048.92,1321.27 1048.92,1288.62 U1.10
  Bottom Layer w25: U2.8 776.7,1539.88 886.83,1539.88 1040.26,1386.45 1040.26,1348.19 1058.05,1330.4 1056.35,1328.7 v1(1052.56,1328.7)
OC2: U1.14 U2.5 | length 625.5
  Top Layer w15: v1(931.03,1216.79) 933.02,1214.8 944.57,1214.8 U1.14
  Bottom Layer w15: U2.5 629.34,1475.11 629.34,1427.99 783.33,1274 872.58,1274 931.03,1215.56 v1(931.03,1216.79)
OC3: U1.18 U6.8 | length 589.3
  Top Layer w15: v1(927.39,968.31) 931.04,968.31 U1.18
  Bottom Layer w19.68: U6.8 691.79,600.16 691.79,613.73 835.83,757.77 835.83,881.52 922.62,968.31 v1(927.39,968.31)
OC4: U1.22 U6.5 | length 350.3
  Top Layer w15: v1(999.53,866.09) 1006.99,866.09 U1.22
  Top Layer w19.68: v1(999.53,866.09) v1@999.53,869.14
  Bottom Layer w19.68: U6.5 999.53,813.04 v1(999.53,866.09)
OUT1: B1.1 C17.1 D2.1 U2.7 | length 1235.1
  Top Layer w20: B1.1 1102.75,1727.73 1316.61,1727.73 1344.22,1755.35 1344.22,1760.98 1416.2,1832.97 1416.2,1902.64 1436.69,1923.12 D2.1
  Bottom Layer w30: U2.7 575.23,1670.64 575.23,1714.38 599.92,1739.07 705.66,1739.07 796.01,1829.43 1047.06,1829.43 1090.15,1786.33 B1.1
OUT2: B2.1 C18.1 D3.1 U2.6 | length 938.9
  Top Layer w20: D3.1 50.97,1874.5 68.12,1857.36 135.93,1857.36 C18.1@203.8,1789.48
  Bottom Layer w20: v1(213.86,1765.23) 224.65,1776.02
  Bottom Layer w30: 224.65,1776.02 B2.1 291.41,1511.52 429.98,1650.09 525.07,1650.09 U2.6
OUT3: B3.1 C19.1 D4.1 U6.7 | length 1332.7
  Top Layer w10: D4.1@40.59,1009.97 68.03,982.53 122.23,982.53 C19.1
  Top Layer w31.5: C19.1@194.76,910 v1(208.54,910)
  Bottom Layer w31.5: v1(208.54,910) 254.71,863.84 254.71,688.27 302.07,688.27 360.96,629.38 433.95,629.38 683.66,379.67 768.86,379.67 816.47,427.28 816.47,546.19 U6.7
OUT4: B4.1 C20.1 D5.1 U6.6 | length 920.8
  Top Layer w10: D5.1 456.21,47.81 476.17,67.77 476.17,124.15 C20.1@552.67,200.64
  Top Layer w31.5: v1(549.96,203.36) C20.1@551.59,203.36
  Bottom Layer w30: U6.6 862.68,570.69 862.68,353.76
  Bottom Layer w31.5: v1(549.96,203.36) 579.81,233.21 B4.1 801.15,292.22 862.68,353.76
pads on no net: CN1.4 CN1.8 CN1.9 CN2.2 CN2.3 CN2.4 CN2.8 CN2.9 U1.4 U1.5 U1.32 U3.6 U3.8

## Polygon pours and split planes (outlines as drawn)
GND on Bottom Layer "Top Layer-No Net" (solid, remove dead copper, pour order 4): 13.06,1957.73 13.07,1957.74 1964.78,1957.74 1964.78,16.32 1956.51,8.05 1952.39,3.93 10.99,3.93
GND on Top Layer "Top Layer-No Net" (solid, remove dead copper, pour order 2): 10.99,1959.8 15.12,1955.66 1970.99,1955.66 1970.99,16.35 1960.65,6 1956.5,1.86 13.06,1.86

## Silkscreen, mask and mechanical layers (free items; w line width, h text height)
Top Overlay:
  lines w10: -0.05,1970.52 1975.89,1970.52 ; 2.87,1970.74 2.87,-1.66 1961.33,-1.66 ; 1740.56,1487.74 ccw(c1795.56,1539.74) 1847.56,1484.74 ; 1970.98,5.01 1970.98,1973.67
  text "USB1" at 880.18,1629.25 h40
  text "WikiHub-Mini" at 1402.45,1613.15 h78.74
  text "Rev.A1" at 1408.38,1540.84 h78.74
  text "i  i" at 1729.56,1520.73 h40
  text "W" at 1767.56,1497.73 h80
  text "USB2" at 355.36,1286.57 h40 r90
  text "USB0" at 1765.38,1258.77 h40
  text "USB3" at 350.12,459.11 h40 r90
  text "Power" at 1767.19,373.97 h40
  text "USB4" at 873.35,317.92 h40
Bottom Overlay:
  text "H" at 1853.82,1529.02 h80
  text "N" at 1462.62,1519.05 h80